# Altium PCB 12.4呼叫器.PcbDoc
Units mm, origin at the board's own origin, x right, y up, seen from the top; angles counter-clockwise.
Board outline 60 x 92 mm, 2 copper layers (Top Layer, Bottom Layer); 66 components, 43 nets, 268 pads, 58 vias.
Unrouted connection lines stored in the file: 5.
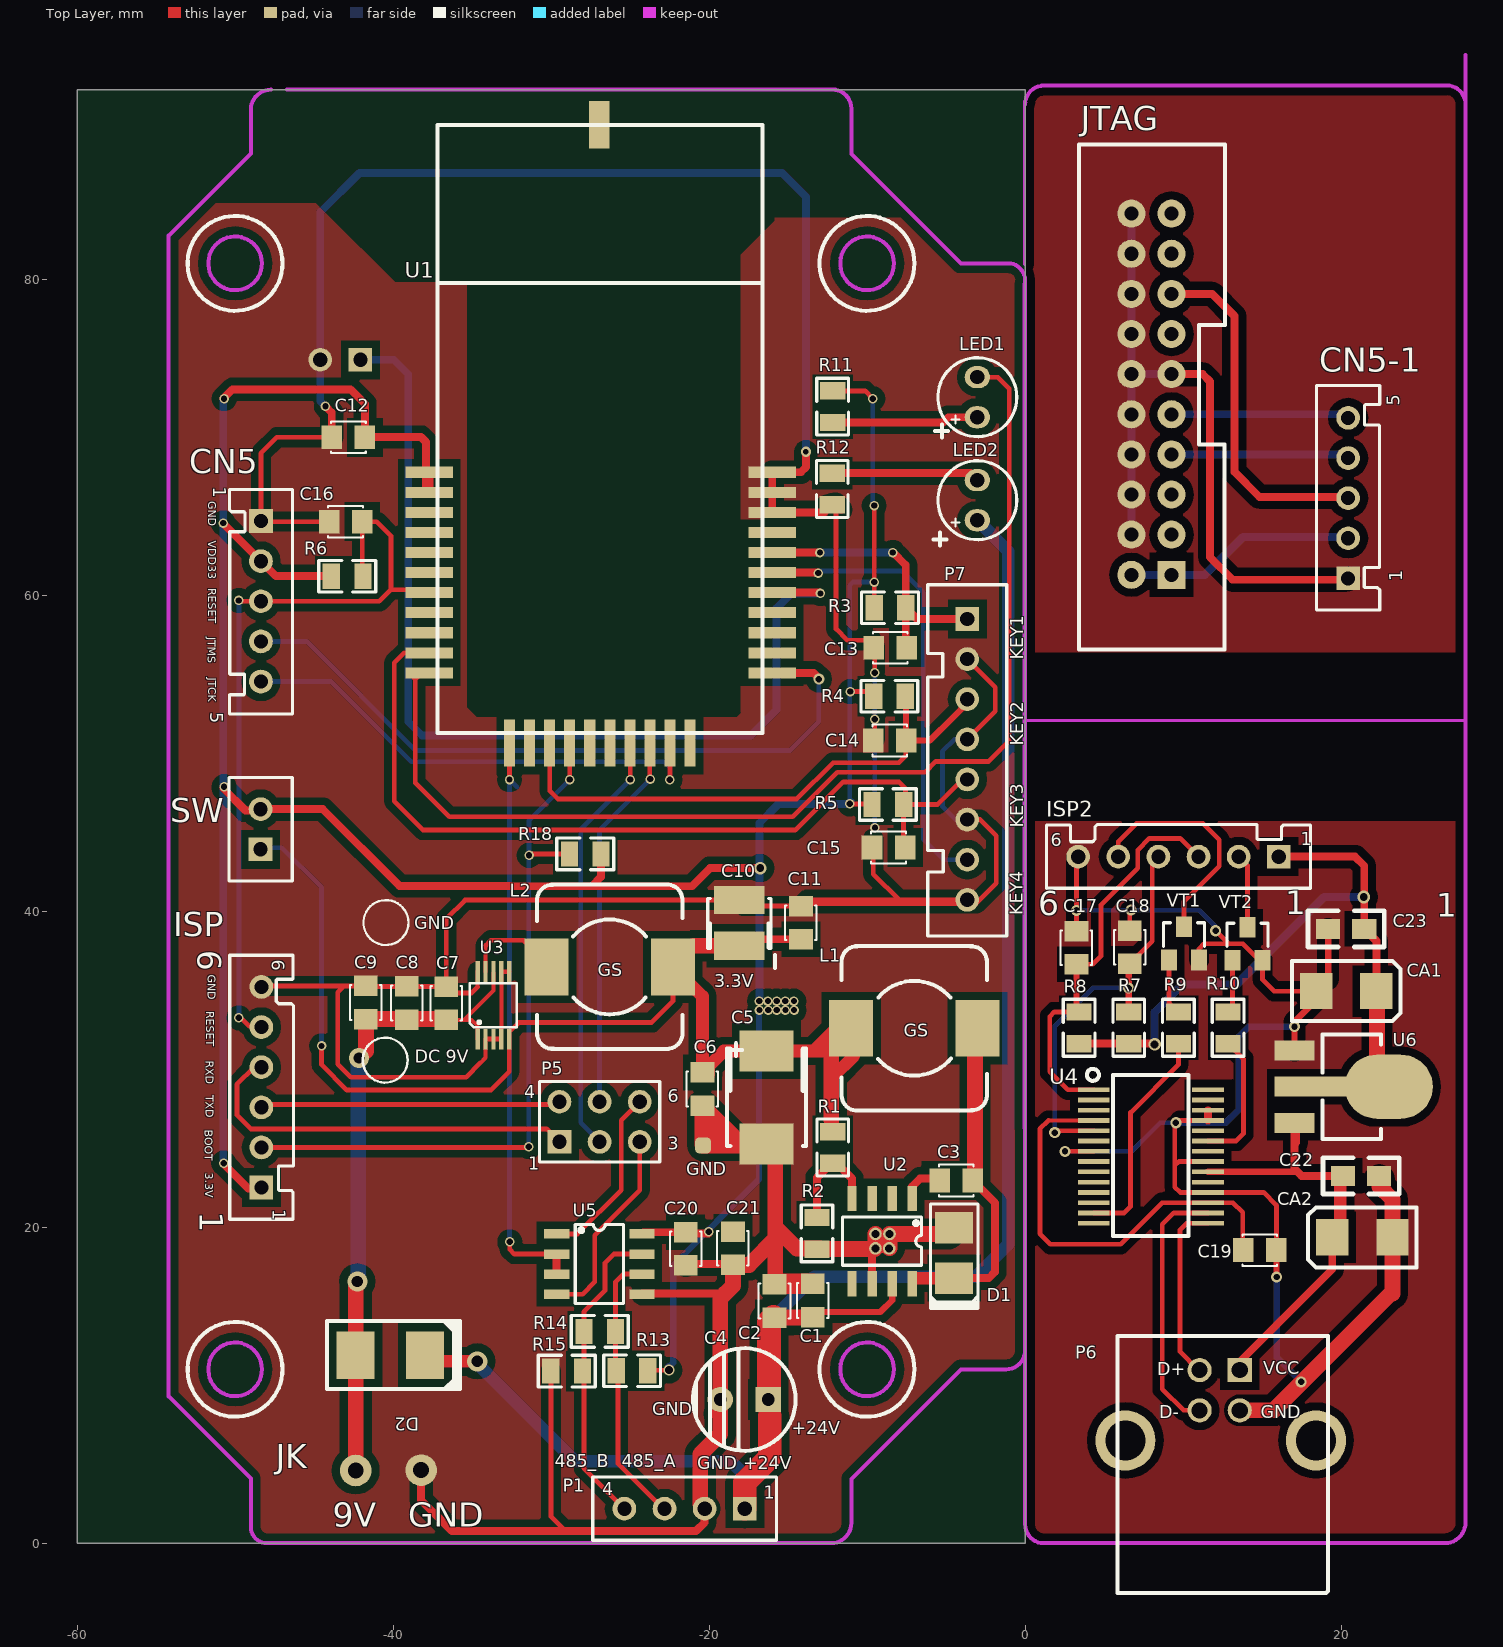
[diagram p0: Top Layer view]
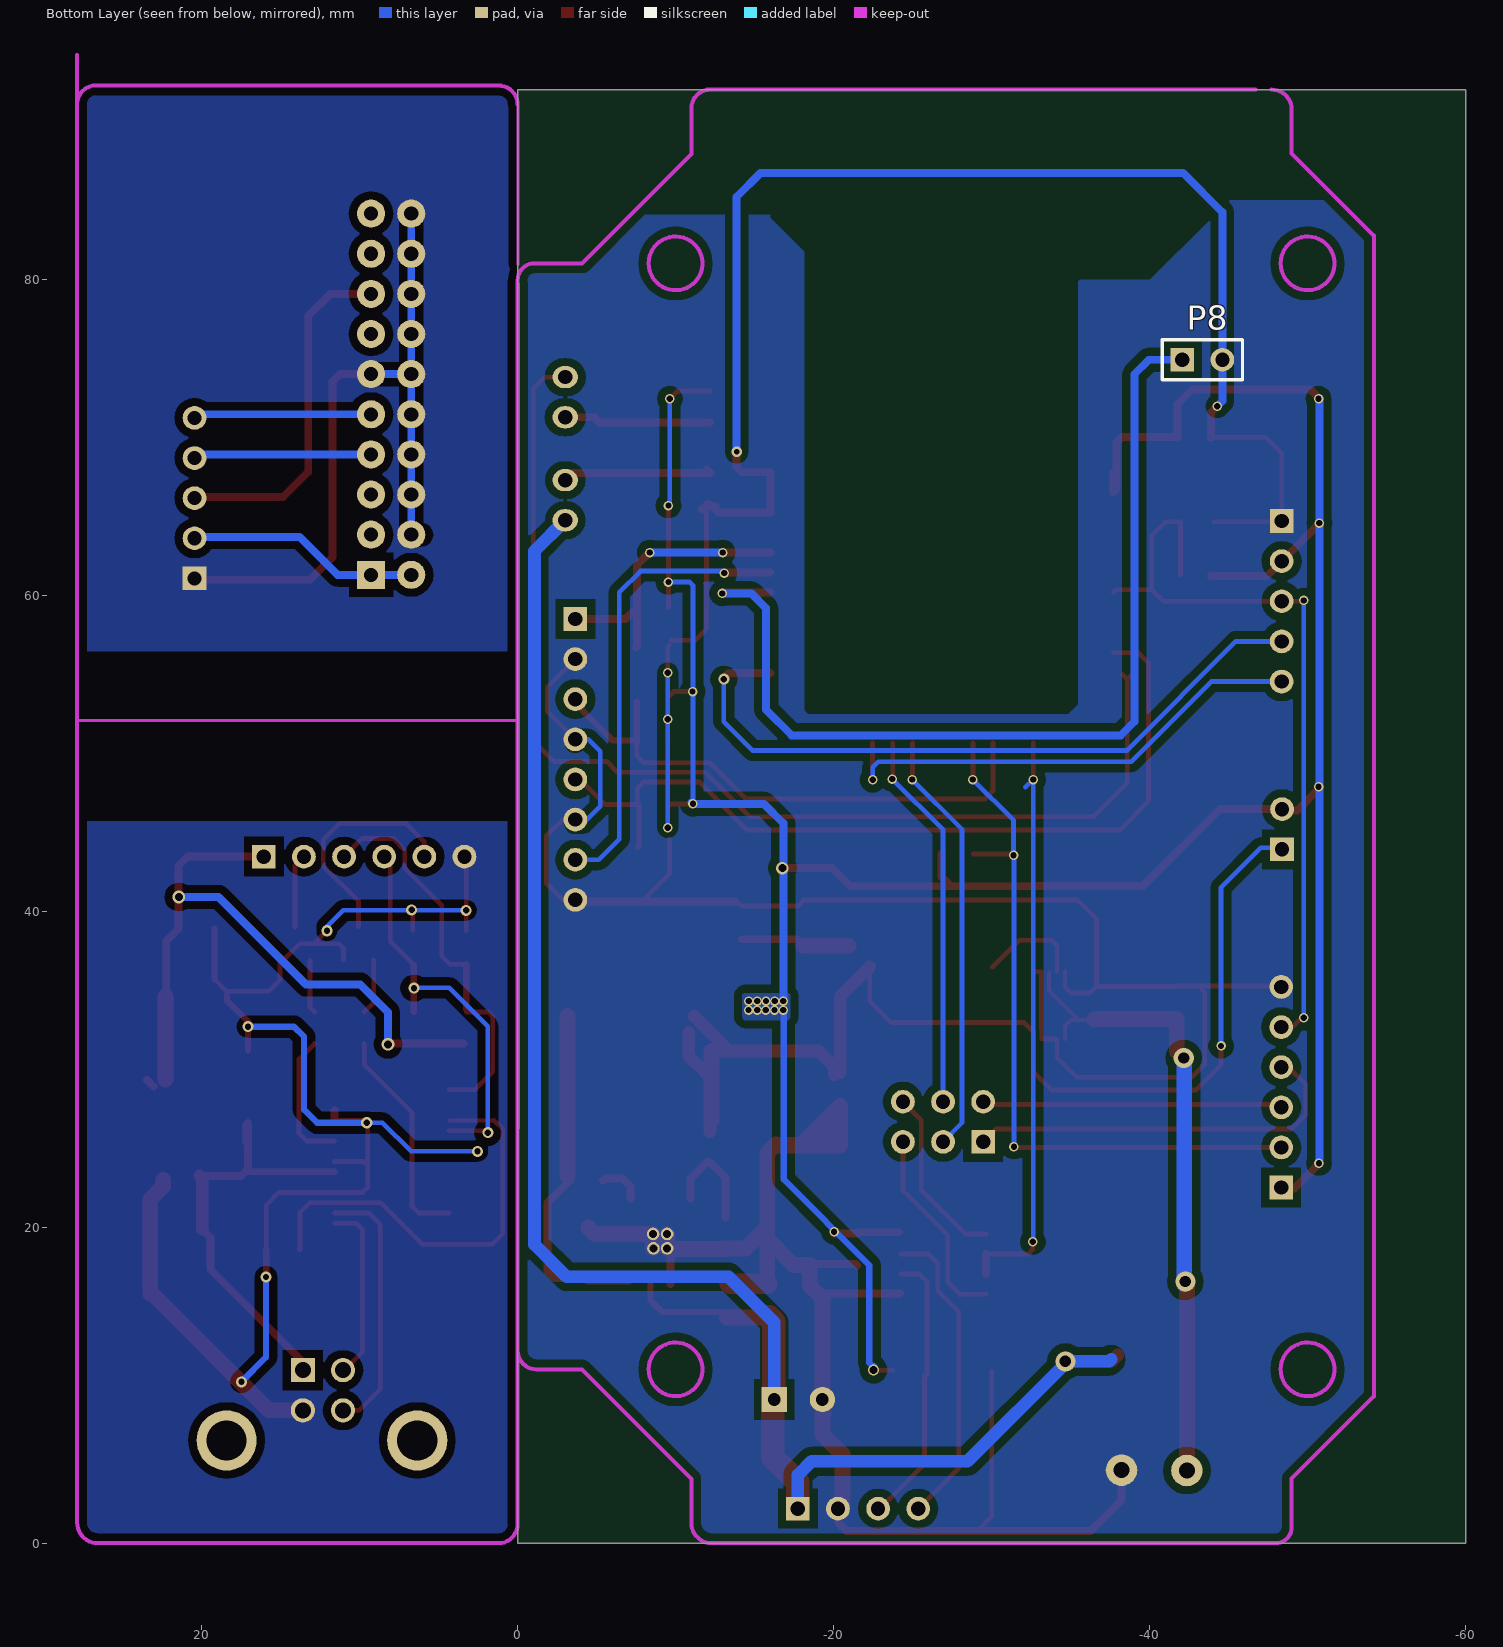
[diagram p1: Bottom Layer view, seen from below]

## Layer stack, top to bottom
Top Solder: solder mask 0.0102, Solder Resist, Dk 3.5
Top Layer: signal copper 0.0356
Dielectric1: dielectric 0.32, FR-4, Dk 4.8
Bottom Layer: signal copper 0.0356
Bottom Solder: solder mask 0.0102, Solder Resist, Dk 3.5

## Board outline
-60,0 0,0 0,92 -60,92

## Design rules (kind name [scope] priority, off if disabled: settings)
Clearance Clearance_1 [InComponent('U3')] p1: gap=0.2
Clearance leigerule [InPolygon] p2: gap=0.5
Clearance [All] p3: gap=0.24
FabricationTestPointUsage TestPointUsage [All] p1: valid=0 allowmultiple=FALSE
FabricationTestpoint Testpoint [All] p1: side=3 testpointundercomponent=TRUE minsize=1.016 maxsize=2.54 preferedsize=1.524 minholesize=0 maxholesize=1.016 preferedholesize=0.813 testpointgrid=0.025 allowsidetop=TRUE allowsidebottom=TRUE usegrid=TRUE gridtolerance=0
PolygonConnect [All] p1: connectstyle=Direct reliefconductorwidth=0.5 reliefentries=4 polygonreliefangle="90 Angle" airgapwidth=0.254
RoutingVias [All] p1: holewidth=0.711 width=1.27 viastyle="Through Hole" minholewidth=0.711 minwidth=1.27 maxholewidth=0.711 maxwidth=1.27
SolderMaskExpansion [All] p1: expansion=0.102
Width [All] p1: maxlimit=2 minlimit=0.254 preferedwidth=0.3 minimp=50.000000 maximp=50.000000 favimp=50.000000
27 further rules are at their usual default settings.

## Components (designator, comment, footprint, x,y, rotation, side; value= is the part's Value field where it differs from the comment)
C1 "4.7μF/10%/0805" C-0805 -14.33,17.06 r270 top
C2 "4.7μF/10%/0805" C-0805 -16.76,17.03 r270 top
C3 "0.01μF/10%/0805" C-0805 -6.06,22.05 r0 top
C4 "220μF" CZ3.0/6.5 -17.77,9.09 r0 top
C5 "476C" C-TAN-D -18.86,32.45 r270 top
C6 "0.1μf/10%/0805" C-0805 -19.52,27.04 r90 top
C7 "4.7μF/10%/0805" C-0805 -37.538,35.876 r270 top
C8 "4.7μF/10%/0805" C-0805 -40.03,35.89 r270 top
C9 "4.7μF/10%/0805" C-0805 -42.621,35.916 r270 top
C10 "47uF/20%/10V/B" C-TAN-B -16.078,36.906 r90 top
C11 "0.1μf/10%/0805" C-0805 -15.088,40.97 r270 top
C12 "0.1uf/10%/0805" C-0805 -44.53,69.09 r0 top
C13 "0.1uf/10%/0805" C-0805 -10.236,55.778 r0 top
C14 "0.1uf/10%/0805" C-0805 -10.26,49.9 r0 top
C15 "0.1uf/10%/0805" C-0805 -10.338,43.129 r0 top
C16 "0.1uf/10%/0805" C-0805 -44.704,63.754 r0 top
C17 "100pf/10%/0805" C-0805 2.35,39.39 r270 top
C18 "100pf/10%/0805" C-0805 5.73,39.42 r270 top
C19 "0.1μf/10%/0805" C-0805 16.56,19.45 r180 top
C20 "0.1uf/10%/0805" C-0805 -20.58,16.93 r90 top
C21 "1uf/10%/0805" C-0805 -17.59,16.96 r90 top
C22 "0.1uF" C0805 19.87,23.25 r180 top
C23 "0.1uF" C0805 21.72,38.88 r0 top
CA1 "4.7UF/16V" 3528 22.49,32.27 r0 top
CA2 "10UF/16V" 3528 19.19,22.03 r180 top
CN5 "1*5/排针" PIN-S-2.54-1*5 -48.362,64.694 r270 top
CN5-1 "1*5/排针座" PIN-S-2.54-1*5 20.447,61.062 r90 top
D1 "1N5408/SMA" "SMA 2+" -6.04,21.51 r270 top
D2 "SS34" SMB -43.688,9.804 r0 top
ISP "1*6/排针" PIN-S-2.54-1*6 -48.336,22.504 r90 top
ISP2 "1*6/排针座" PIN-S-2.54-1*6 16.06,43.45 r180 top
JTAG "2*10/排针" IDC-20 9.27,61.264 r90 top
L1 "15μH" GSDS104C2 -7.01,32.588 r270 top
L2 "15μH" GSDS104C2 -26.289,36.474 r90 top
LED1 "green LED" LED-φ3 -3.02,72.53 r90 top
LED2 "red LED" LED-φ3 -3.02,66.01 r90 top
P1 "1*4/2.54排针" PIN-S-2.54-1*4 -17.74,2.18 r180 top locked
P5 "2*3排针" HDR2X3_CEN -29.47,25.4 r0 top
P6 "1*4/2.54排针" USB_B_90D 13.614,10.973 r270 top
P7 "Header 8" HDR1X8 -3.658,58.496 r270 top (schematic designator P6)
P8 "Header 2" HDR1X2 -42.07,74.9 r180 bottom
R1 "10K" R-0805 -11.278,23.546 r90 top
R2 "5.9K/1%" R-0805 -14.07,21.11 r270 top
R3 "10K/5%/0805" R-0805 -7.05,60.11 r180 top
R4 "10K/5%/0805" R-0805 -7.087,54.508 r180 top
R5 "10K/5%/0805" R-0805 -7.188,47.65 r180 top
R6 "10K/5%/0805" R-0805 -41.402,62.103 r180 top
R7 "3.3K/5%/0805" R-0805 5.663,34.12 r270 top
R8 "3.3K/5%/0805" R-0805 2.52,34.12 r270 top
R9 "1K/5%/0805" R-0805 8.807,34.12 r270 top
R10 "1K/5%/0805" R-0805 11.95,34.12 r270 top
R11 "510Ω/5%/0805" R-0805 -13.08,73.43 r270 top
R12 "4K/5%/0805" R-0805 -11.31,65.22 r90 top
R13 "3.3K/5%/0805" R-0805 -26.37,10.01 r0 top
R14 "120ohm" R-0805 -28.42,12.5 r0 top
R15 "3.3K/5%/0805" R-0805 -30.51,9.99 r0 top
R18 "10K/5%/0805" R-0805 -29.337,42.723 r0 top
SW "SW-1" PIN-S-2.54-1*2 -48.387,43.917 r90 top
U1 "STM32W_1" STM32W108-3 -16.63,51.27 r90 top locked
U2 "TPS5430" SO-G8 -9.06,19.11 r180 top
U3 "TPS62056" MSOP-10 -34.648,32.006 r0 top
U4 "FT232R" SSOP-28 4.34,28.7 r0 top
U5 "MAX3485CSA" SO-G8 -26.949,17.653 r270 top
U6 "AS1117-3.3V" SOT-223 23,28.89 r270 top
VT1 "2N3904" SOT23-3 9.11,36.91 r0 top
VT2 "2N3904" SOT23-3 13.13,36.89 r0 top

## Footprints (in the part's own frame and the unit in brackets; to place one, negate y for a bottom-side part, rotate by r counter-clockwise, add the part's x,y. Pads: shape width x height; smd on the part's side, far side on the other; paste and mask are expansions set on the pad)
3528 [mil]
  rect 80.63x90 smd: 1(-10,105) 2(-160,105)
  silkscreen extent -220,30 50,180
C0805 [mil]
  rect 60x50 smd: 1(-100,0) 2(-10,0)
  silkscreen extent -150,-45 40,45
C-0805 [mm]
  rect 1.3x1.5 smd: 1(0.65,0.9) 2(2.75,0.9)
  silkscreen extent 0.6,-0.1 2.8,1.9
C-TAN-B [mm]
  rect 1.8x3.2 smd: 1(0.9,2) 2(3.8,2)
  silkscreen extent 0.75,0 3.9,4
C-TAN-D [mm]
  rect 2.6x3.4 smd: 1(1.3,2.5) 2(7.2,2.5)
  silkscreen extent 1.15,0 7.3,5
CZ3.0/6.5 [mm]
  rect 1.6x1.6 hole 0.8: 1(1.524,0)
  round 1.6 hole 0.8: 2(-1.524,0)
  silkscreen extent -3.25,-3.25 3.25,3.25
GSDS104C2 [mm]
  rect 3.6x2.8 smd: 1(0,4) 2(0,-4)
  silkscreen extent -5.2,-4.6 5.21,4.6
HDR1X2 [mm] "Connector; Header; 2 Positi"
  rect 1.5x1.5 hole 0.9: 1(0,0)
  round 1.5 hole 0.9: 2(2.54,0)
  silkscreen extent -1.27,-1.27 3.81,1.27
HDR1X8 [mm] "Connector; Header; 9 Position"
  rect 1.5x1.5 hole 0.9: 1(0,0)
  round 1.5 hole 0.9: 2(2.54,0) 3(5.08,0) 4(7.62,0) 5(10.16,0) 6(12.7,0) 7(15.24,0) 8(17.78,0)
  silkscreen extent -2.16,-2.5 20.07,2.5
HDR2X3_CEN [mm] "Connector; Header; 3x2 Position"
  rect 1.5x1.5 hole 0.9: 1(0,0)
  round 1.5 hole 0.9: 2(2.54,0) 3(5.08,0) 4(0,2.54) 5(2.54,2.54) 6(5.08,2.54)
  silkscreen extent -1.27,-1.27 6.35,3.81
IDC-20 [mil]
  rect 70x70 hole 35: 1(1,0)
  round 70 hole 35: 2(1,100) 3(101,0) 4(101,100) 5(201,0) 6(201,100) 7(301,0) 8(301,100) 9(401,0) 10(401,100) 11(501,0) 12(501,100) 13(601,0) 14(601,100) 15(701,0) 16(701,100) 17(801,0) 18(801,100) 19(901,0) 20(901,100)
  silkscreen extent -185,-133 1073,231
LED-φ3 [mm]
  oval 1.4x1.6 hole 0.9: 1(-1.27,0) 2(1.27,0)
  silkscreen extent -2.5,-2.5 2.5,2.5
MSOP-10 [mm]
  rect 0.27x1.3 smd mask+0.05: 1(0,-0.1) 2(0.5,-0.1) 3(1,-0.1) 4(1.5,-0.1) 5(2,-0.1) 6(2,4.175) 7(1.5,4.175) 8(1,4.175) 9(0.5,4.175) 10(0,4.175)
  silkscreen extent -0.51,0.64 2.46,3.43
PIN-S-2.54-1*2 [mm]
  rect 1.5x1.5 hole 0.9: 1(0,0)
  round 1.5 hole 0.9: 2(2.54,0)
  silkscreen extent -2,-2 4.54,2
PIN-S-2.54-1*4 [mm]
  rect 1.5x1.5 hole 0.9: 1(0,0)
  round 1.5 hole 0.9: 2(2.54,0) 3(5.08,0) 4(7.62,0)
  silkscreen extent -2,-2 9.62,2
PIN-S-2.54-1*5 [mm]
  rect 1.5x1.5 hole 0.9: 1(0,0)
  round 1.5 hole 0.9: 2(2.54,0) 3(5.08,0) 4(7.62,0) 5(10.16,0)
  silkscreen extent -2,-2 12.22,2
PIN-S-2.54-1*6 [mm]
  rect 1.5x1.5 hole 0.9: 1(0,0)
  round 1.5 hole 0.9: 2(2.54,0) 3(5.08,0) 4(7.62,0) 5(10.16,0) 6(12.7,0)
  silkscreen extent -2,-2.03 14.7,2
R-0805 [mm]
  rect 1.1x1.6 smd: 1(0.5,0.9) 2(2.5,0.9)
  silkscreen extent -0.3,-0.1 3.3,1.9
"SMA 2+" [mm]
  rect 2x2.4 smd: 1(1.538,1.554) 2(4.738,1.554)
  silkscreen extent 0.04,0.05 6.64,3.05
SMB [mm]
  rect 2.4x3 smd: 1(1.3,2.1) 2(5.7,2.1)
  silkscreen extent -0.51,-0.05 7.92,4.24
SO-G8 [mm]
  rect 0.6x1.6 smd: 1(-1.916,-2.7) 2(-0.646,-2.7) 3(0.624,-2.7) 4(1.894,-2.7) 5(1.894,2.7) 6(0.624,2.7) 7(-0.646,2.7) 8(-1.916,2.7)
  silkscreen extent -2.51,-1.52 2.49,1.52
SOT23-3 [mm]
  rect 1x1.3 smd: 1(0,0) 2(1.9,0) 3(0.95,2.1)
  silkscreen extent -0.35,0.87 2.25,2.35
SOT-223 [mil]
  rect 50x100 smd: 1(-90.5,-234) 3(90.5,-234)
  oval 160x220 smd: 2(0,1)
  rect 50x200 smd: 2(0,-184)
  silkscreen extent -130,-164 130,-19
SSOP-28 [mm]
  rect 2x0.3 smd: 1(0,0) 2(0,-0.65) 3(0,-1.3) 4(0,-1.95) 5(0,-2.6) 6(0,-3.25) 7(0,-3.9) 8(0,-4.55) 9(0,-5.2) 10(0,-5.85) 11(0,-6.5) 12(0,-7.15) 13(0,-7.8) 14(0,-8.45) 15(7.239,-8.45) 16(7.239,-7.8) 17(7.239,-7.15) 18(7.239,-6.5) 19(7.239,-5.85) 20(7.239,-5.2) 21(7.239,-4.55) 22(7.239,-3.9) 23(7.239,-3.25) 24(7.239,-2.6) 25(7.239,-1.95) 26(7.239,-1.3) 27(7.239,-0.65) 28(7.239,0)
  silkscreen extent -0.43,-9.27 5.99,1.32
STM32W108-3 [mm]
  rect 0.7x3 smd: 1(16.51,21.074) 2(15.24,21.074) 3(13.97,21.074) 4(12.7,21.074) 5(11.43,21.074) 6(10.16,21.074) 7(8.89,21.074) 8(7.62,21.074) 9(6.35,21.074) 10(5.08,21.074) 11(3.81,21.074) 22(3.81,-0.627) 23(5.08,-0.627) 24(6.35,-0.627) 25(7.62,-0.627) 26(8.89,-0.627) 27(10.16,-0.627) 28(11.43,-0.627) 29(12.7,-0.627) 30(13.97,-0.627) 31(15.24,-0.627) 32(16.51,-0.627)
  rect 3x0.7 smd: 12(-0.627,16.002) 13(-0.627,14.732) 14(-0.627,13.462) 15(-0.627,12.192) 16(-0.627,10.922) 17(-0.627,9.652) 18(-0.627,8.382) 19(-0.627,7.112) 20(-0.627,5.842) 21(-0.627,4.572)
  rect 3x1.3 smd: ""(38.5,10.314)
  silkscreen extent 0,0 38.5,20.57
USB_B_90D [mil]
  rect 60.06x60.06 hole 40: 1(1,-1)
  round 60.06 hole 40: 2(1,-101) 3(101,-101) 4(101,-1)
  round 150 hole 100: 5(176,-286) 6(176,189)
  silkscreen extent -84,-306 556,219

## Part data
C1 C2 C3 C6 C7 C8 C9 C11 C12 C13 C14 C15 C16 C17 C18 C19 C20 C21 C22 C23: library part Cap, "Capacitor"
C4 C5: library part "Cap Pol1", "Polarized Capacitor (Radial)"
C10: library part ASC-0013BA
CA1 CA2: library part ECAP
CN5 CN5-1: library part Header1*5
D1 D2: library part "Diode 1N5408", "3 Amp Medium Power Silicon Rectifier Diode"
ISP ISP2: library part Header1*6
JTAG: library part Header2*10
L1 L2: library part Inductor, "Inductor"
LED1: library part LED
LED2: library part LED3, "Typical BLUE SiC LED"
P1 P6: library part "Header 4", "Header, 4-Pin"
P5: library part "Header 3X2A", "Header, 3-Pin, Dual row"
P7: "Header, 8-Pin"
P8: "Header, 2-Pin"
R1 R2 R3 R4 R5 R6 R12 R18: library part Res2, "Resistor"
R7 R8: library part RES_1
R9 R10 R11 R13 R14 R15: library part RES, "R"
U1: library part STM32W108-3
U5: library part MAX485CSA, "Low-Power, Slew-Rate-Limited RS-485/RS-422 Transceiver"
U6: library part AS1117
VT1 VT2: library part NPN, "NPN Transistor"

## Free pads (board coordinates)
  round 2 hole 1: 0(-38.227,4.623) 1(-42.367,4.597)
  round 0.8 hole 0.5: 0(-9.47,19.57) 1(-8.58,19.57) 2(-9.47,18.66) 3(-8.6,18.66)
  rrect50% 1x1 smd: 5(-20.38,25.17)

## Via types
v1: diameter 0.6, hole 0.4, Top Layer to Bottom Layer, 39 vias
v2: diameter 0.7, hole 0.4, Top Layer to Bottom Layer, 11 vias
v3: diameter 0.8, hole 0.5, Top Layer to Bottom Layer, 3 vias
v4: diameter 1.27, hole 0.711, Top Layer to Bottom Layer, 3 vias
v5: diameter 0.7, hole 0.5, Top Layer to Bottom Layer, 1 vias
v6: diameter 0.65, hole 0.35, Top Layer to Bottom Layer, 1 vias

## Nets (pads, with @x,y where several pads share a name; then routed paths per layer and width w, separated by ;. In a path a pad name is that pad's centre, name@x,y a point inside that pad or via, vN(x,y) a via of type N, cw(c..) or ccw(c..) an arc to the next point about the centre after c; other vN are vias at no path point)
485_A: P1.3 R13.1 R14.2 U5.6 | length 17.5
  Top Layer w0.3: R13.1@-25.92,10.64 R14.2 -25.92,16.549 -25.44,17.029 U5.6 ; R13.1@-25.76,10.64 -25.76,5.03 -22.91,2.18 P1.3
485_B: P1.4 R14.1 R15.2 U5.7 | length 19.7
  Top Layer w0.3: P1.4 -27.92,4.74 R14.1 -27.92,14.65 -26.594,15.977 -26.594,17.729 -26.024,18.299 U5.7
+VBRD: CN5-1.2 JTAG.1 JTAG.2 | length 14.7
  Bottom Layer w0.5: JTAG.2 JTAG.1 11.395,61.289 13.79,63.684 20.365,63.684 CN5-1.2
/RESET: C16.2 CN5-1.3 CN5.3 ISP2.5 ISP.5 JTAG.15 R6.1 U1.7 VT1.3 | length 86.5
  Top Layer w0.3: v1(-49.759,33.249) -49.636,33.249 -49.098,32.711 -48.383,32.711 ISP.5 ; v1(-49.759,59.665) -49.708,59.614 CN5.3 -40.869,59.614 -40.132,60.35 ; R6.1@-41.954,61.255 C16.2 -41.032,64.654 -40.132,63.754 -40.132,60.35 ; U1.7 -37.894,60.35 -40.132,60.35 ; ISP2.5 5.9,44.406 7.036,45.542 11.278,45.542 12.294,44.526 12.294,42.85 10.06,40.616 VT1.3
  Top Layer w0.5: JTAG.15 11.844,79.069 13.25,77.664 13.25,67.804 14.83,66.224 20.365,66.224 CN5-1.3
  Bottom Layer w0.3: v1(-49.759,33.249) v1(-49.759,59.665)
BOOT: ISP2.2 ISP.2 R18.1 U1.15 VT2.3 | length 50.8
  Top Layer w0.3: ISP.2 v1@-31.42,25.044 ; v1(-31.394,43.536) -31.307,43.623 R18.1 ; v1(-28.82,48.33) U1.15@-28.82,50.641 ; ISP2.2 14.08,42.89 VT2.3
  Bottom Layer w0.3: v1(-31.42,25.095) -31.42,43.51 v1(-31.394,43.536) -31.394,45.756 v1(-28.82,48.33)
CBUS0: R10.2 U4.23 | length 8.5
  Top Layer w0.3: U4.23 13.35,25.45 13.83,25.93 13.83,30.64 R10.2
CBUS2: R9.2 U4.13 | length 14.1
  Top Layer w0.3: U4.13 6.27,20.9 6.68,21.311 6.68,27.254 9.707,30.281 R9.2
D+: P6.2 U4.15 | length 11.4
  Top Layer w0.3: P6.2 10.973,10.947 9.81,12.11 9.81,19.84 10.22,20.25 U4.15
D-: P6.3 U4.16 | length 16.5
  Top Layer w0.3: P6.3 10.033,8.407 8.69,9.75 8.69,20.17 9.42,20.9 U4.16
GND: C1.1 C2.1 C4.2 C5.2 C6.1 C7.1 C8.1 C9.1 C10.2 C11.1 C12.1 C13.1 C14.1 C15.1 C16.1 C17.1 C18.1 C19.1 C20.1 C21.1 C22.1 C23.1 CA1.2 CA2.2 CN5.1 D1.1 ISP2.6 ISP.6 P1.2 P6.4 P7.2 P7.4 P7.6 P7.8 P8.2 pad.0 pad.1@-8.58,19.57 pad.2 pad.3 pad.5 R2.2 R12.1 R15.1 U1.30 U1.31 U1.32 U2.6 U3.2 U3.3 U3.4 U3.6 U3.7 U3.10 U4.7 U4.18 U4.21 U4.25 U4.26 U5.5 U6.1 VT1.2 VT2.2 | length 430.1
  Top Layer w0.26: -34.648,35.202 U3.10 ; -34.468,30.404 -34.148,30.724 U3.2 ; U3.4@-33.168,31.906 -33.168,32.577 -33.148,32.597 U3.7
  Top Layer w0.3: ISP.6 -48.275,35.266 -43.093,35.266 ; C16.1 -48.322,64.654 CN5.1 -48.362,68.986 -47.358,69.99 C12.1 ; C9.1 -43.093,35.266 ; C9.1@-41.682,35.226 C7.1 ; -34.648,35.202 -35.027,34.823 -36.235,34.823 C7.1 ; -34.468,30.404 -35.382,29.489 -42.672,29.489 -43.497,30.315 -43.497,34.861 -43.093,35.266 ; U3.2@-34.061,31.902 U3.3 -33.299,31.906 ; U3.7@-33.045,36.17 U3.6 ; R15.1 -30.01,1.689 -29.083,0.762 ; R12.1 -11.96,65.47 -11.96,57.86 -11.24,57.14 C13.1@-9.7,57.14 ; C15.1@-9.61,44.59 -9.61,42.35 -7.976,40.716 ; C13.1@-9.606,56.841 -9.51,56.745 v1(-9.51,55.093) ; C14.1@-9.51,50.9 v1(-9.51,52.146) ; P7.8 -7.976,40.716 ; P7.6 -2.846,45.796 -1.82,44.77 -1.82,41.76 -3.09,40.49 -3.64,40.49 -3.65,40.48 C11.1@-14.028,40.48 ; P7.4 -1.88,52.654 -1.88,54.178 P7.2 ; v2(2.53,24.8) U4.7 ; C17.1 v2(3.25,40.056) ISP2.6@3.25,43.34 ; C18.1 6.63,40.006 v2(6.706,40.081) ; v2@9.48,26.42 9.48,23.91 ; v2@9.81,26.75 U4.25 ; VT1.2 11.01,37.617 11.323,37.93 12.903,37.93 ; U4.21 9.72,24.15 9.48,23.91 ; v2(12.065,38.76) 12.073,38.76 12.903,37.93 ; v2@15.91,16.856 v2(15.926,16.84) ; C19.1 15.91,21.4 15.11,22.2 9.82,22.2 9.48,22.54 9.48,23.91 ; CA1.2@18.39,34.646 18.39,34.901 CA1.2 ; CA1.2@19.18,35.691 CA1.2 ; C7.1 -36.638,39.511 -35.443,40.706 C10.2 -18.078,40.647 -17.752,40.32 C11.1 C11.1@-14.028,40.48 ; C11.1@-14.028,40.48 -13.792,40.716 -7.976,40.716 ; 12.903,37.93 13.792,37.93 14.832,36.89 VT2.2 15.03,35.668 15.761,34.937 CA1.2
  Top Layer w0.4: v2@15.91,16.856 C19.1 ; U6.1 v2(17.056,32.69) 17.056,33.008 18.39,34.341 CA1.2@18.39,34.646 ; CA1.2@19.18,35.691 C23.1
  Top Layer w0.5: v1(-44.28,71.95) -43.88,71.55 C12.1 ; pad.0@-38.227,4.623 -38.227,2.718 -36.271,0.762 -29.083,0.762 -20.828,0.762 -20.28,1.31 P1.2 ; U5.5@-24.21,15.796 -18.984,15.796 ; C20.1 -21.4,17.66 C21.1@-18.49,17.66 ; v6(-13.87,69.07) -13.87,68.1 -14.19,67.78 U1.32 U1.30 -12.69,65.24 R12.1 ; R12.1@-12.53,65.63 R12.1@-12.52,65.62 ; R12.1@-12.01,65.76 R12.1@-11.96,65.71 ; R12.1@-11.829,65.579 R12.1@-11.66,65.41 ; U2.6 -9.684,18.446 -9.52,18.61 -8.65,18.61 pad.3 pad.3@-8.58,18.68 ; U4.25 U4.26
  Top Layer w1: P1.2 -20.56,2.46 -20.56,5.63 -19.294,6.896 -19.294,8.18 ; -19.366,8.18 -19.294,8.18 ; C2.1@-15.93,16.29 -15.81,16.41 -15.81,20.01 ; -15.63,19.45 -17.47,17.61 C21.1 -18.49,16.29 -18.984,15.796 -19.294,15.486 C4.2 -19.294,8.18 ; R2.2 R2.2@-12.93,18.61 ; pad.2@-9.52,18.61 R2.2@-12.93,18.61 ; pad.2 pad.0@-9.47,19.57 ; pad.3@-8.58,18.68 -8.58,19.57 -4.888,19.57 D1.1 ; P6.4 15.748,8.407 23.139,15.799 ; C22.1@22.42,22.99 22.42,22.58 23.254,21.746 CA2.2 23.254,15.799 ; -20.42,26.5 C6.1 C5.2@-17.94,25.21 ; -20.42,26.5 -20.42,25.21 pad.5 -16.44,25.17 C5.2@-16.4,25.21 ; -20.42,26.5 -19.13,25.21 C5.2@-17.94,25.21 ; C5.2@-17.94,25.21 C5.2@-16.4,25.21 ; C5.2@-16.4,25.21 C5.2 -15.81,24.7 -15.81,20.01 ; -15.81,20.01 -14.45,18.65 -12.97,18.65 R2.2@-12.93,18.61
  Top Layer w1.3: C2.1@-15.81,16.41 C1.1
  Bottom Layer w0.3: v1@-9.51,45.288 v1(-9.51,52.146) v1(-9.51,55.093) ; P7.4@-3.658,50.65 P7.4@-3.64,50.65 ; P7.4 -4.464,50.876 -5.23,50.11 -5.23,46.63 -4.17,45.57 -3.64,45.57 P7.6@-3.61,45.54 ; v2(2.53,24.8) 6.741,24.8 8.549,26.608 v2(9.544,26.608) ; v2(3.25,40.056) 11.024,40.056 12.065,39.014 v2(12.065,38.76)
  Bottom Layer w0.4: v2(9.544,26.608) 12.689,26.608 13.513,27.432 13.513,32.055 14.148,32.69 v2(17.056,32.69) ; v2(15.926,16.84) 15.926,11.76 v2(17.475,10.211)
  Bottom Layer w0.5: v1(-44.28,71.95) -44.61,72.28 P8.2 -44.61,84.24 -42.13,86.72 -15.37,86.72 -13.87,85.22 v6(-13.87,69.07)
  other v1: -9.5,45.288
GND1: CN5-1.1 JTAG.4 JTAG.6 JTAG.8 JTAG.10 JTAG.11 JTAG.12 JTAG.14 JTAG.16 JTAG.18 JTAG.20 | length 46.6
  Top Layer w0.5: JTAG.11 11.244,73.989 11.71,73.524 11.71,62.404 13.14,60.974 20.359,60.974 CN5-1.1
  Bottom Layer w0.5: JTAG.4@6.105,63.829 JTAG.4 JTAG.6 JTAG.8 JTAG.10 JTAG.12 ; JTAG.20 JTAG.18 JTAG.16 JTAG.14 JTAG.12 ; JTAG.11 JTAG.12
JNTRST: JTAG.3
JTCK: CN5-1.5 CN5.5 JTAG.9 U1.20 | length 42.5
  Top Layer w0.3: v1(-22.479,48.311) -22.472,48.318 U1.20
  Bottom Layer w0.3: CN5.5 -43.917,54.534 -38.837,49.454 -22.835,49.454 -22.479,49.098 v1(-22.479,48.311)
  Bottom Layer w0.5: JTAG.9 20.219,71.449 CN5-1.5
JTDI: JTAG.5
JTDO: JTAG.13
JTMS: CN5-1.4 CN5.4 JTAG.7 U1.22 | length 56
  Top Layer w0.5: U1.22 -13.373,55.08 -13.056,54.763 v2(-13.056,54.682)
  Bottom Layer w0.3: CN5.4 -45.466,57.074 -38.557,50.165 -14.884,50.165 -13.056,51.994 v2@-13.056,54.635
  Bottom Layer w0.5: JTAG.7 20.219,68.909 CN5-1.4
KEY1: C13.2 P7.1 R3.1 U1.28 | length 18.2
  Top Layer w0.5: U1.28 v1(-12.98,62.7) ; v1(-8.37,62.7) -8.35,62.7 -7.55,61.9 R3.1 ; C13.2 -7.55,56.742 R3.1 ; P7.1@-3.658,58.27 P7.1@-3.64,58.27 ; P7.1 -6.836,58.496 R3.1
  Bottom Layer w0.5: v1(-12.98,62.7) v1(-8.37,62.7)
KEY2: C14.2 P7.3 R4.1 U1.14 | length 35.2
  Top Layer w0.3: U1.14 -30.092,47.612 -29.58,47.1 -14.45,47.1 -12.15,49.4 -7.98,49.4 -7.55,49.83 C14.2@-7.55,50.6
  Top Layer w0.4: C14.2@-7.55,50.6 -7.536,50.614 R4.1@-7.536,53.253 ; C14.2 -6.03,50.8 -4.579,52.251 P7.3@-3.64,53.19
KEY3: C15.2 P7.5 R5.1 U1.10 | length 53.7
  Top Layer w0.3: U1.10 -39.3,56.35 -39.93,55.72 -39.93,46.966 -38.1,45.136 -14.544,45.136 -11.5,48.18 -7.98,48.18 -7.57,47.77 -7.57,46.869 R5.1 ; C15.2 -7.688,44.13 R5.1 ; P7.5@-4.189,48.11 -5.548,46.75 R5.1
KEY4: P7.7 U1.27 | length 29.1
  Top Layer w0.3: v1@-13.11,61.43 v1(-13.08,61.4)
  Top Layer w0.5: U1.27 v1@-13.11,61.43
  Bottom Layer w0.3: v1(-13.08,61.4) -12.957,61.523 -7.783,61.523 -6.44,60.18 -6.44,44.56 -5.136,43.256 P7.7
NetC3_1: C3.1 U2.1 | length 2.8
  Top Layer w0.5: U2.1 -7.144,22.576 -6.65,23.07 -5.53,23.07 C3.1
NetC3_2: C3.2 D1.2 L1.1 U2.8 | length 21.8
  Top Layer w0.5: D1.2 -2.298,16.772 -1.9,17.17 -1.9,21.54 C3.2 C3.2@-3.39,23.03
  Top Layer w0.8: U2.8@-6.99,16.772 D1.2
  Top Layer w1: C3.2@-3.17,23.25 L1.1@-3.17,33.36
NetC5_1: C5.1 C6.2 C10.1 C11.2 L1.2 L2.2 R1.2 SW.1 U3.5 | length 83
  Top Layer w0.3: v1(-44.526,31.471) -44.526,30.277 -42.926,28.677 -33.803,28.677 -32.648,29.832 U3.5 -32.648,32.362 -32.06,32.95 -23.647,32.95 -22.289,34.308 L2.2
  Top Layer w0.5: C10.1 -17.664,38.22 C11.2
  Top Layer w0.8: L2.2 -20.42,34.605 C6.2 C6.2@-20.04,30.17 ; C6.2@-20.04,29.65 C6.2@-20.04,30.17 ; L1.2@-12.27,31.15 -13.38,31.15 ; R1.2 -12.178,29.504 -10.838,30.844 L1.2@-10.838,32.326 ; L1.2@-11.499,33.031 -13.38,31.15 ; L1.2@-11.476,33.054 L1.2@-11.17,33.36 ; C6.2@-20.04,30.17 -19.06,31.15 C5.1 -13.38,31.15
  Top Layer w1: L2.2@-20.957,37.806 C10.1 ; -12.27,26.76 L1.2@-12.27,31.15
  Bottom Layer w0.3: SW.1 -48.285,44.018 -47.041,44.018 -44.526,41.504 v1(-44.526,31.471)
NetC19_2: C19.2 U4.4 U4.17 | length 27
  Top Layer w0.26: 1.499,26.746 U4.4@4.287,26.746
  Top Layer w0.3: 1.499,26.746 1.473,26.746 0.94,26.213 0.94,19.583 1.6,18.923 6.045,18.923 8.672,21.55 U4.17 13.16,21.55 13.77,20.94 13.77,18.59 C19.2
NetL2_1: L2.1 U3.9 | length 6.6
  Top Layer w0.26: U3.9 -34.148,37.822
  Top Layer w0.3: -34.148,37.822 -33.81,38.16 -31.76,38.16 L2.1@-30.05,36.45
NetLED1_1: LED1.1 R11.2 | length 9.3
  Top Layer w0.5: R11.2 -5.19,70.93 -4.86,71.26 LED1.1
NetLED2_2: LED2.2 R12.2 | length 9.7
  Top Layer w0.5: R12.2@-11.98,67.95 R12.2 -3.46,67.72 LED2.2
NetR1_1: R1.1 R2.1 U2.4 | length 6.6
  Top Layer w0.5: R2.1 -13.17,23.136 R1.1@-12.27,24.036 ; R1.1@-12.052,24.172 -10.954,23.074 U2.4
NetR9_1: R9.1 VT1.1 | length 3.5
  Top Layer w0.3: VT1.1 9.11,34.217 R9.1
NetR10_1: R10.1 VT2.1 | length 3.4
  Top Layer w0.3: R10.1 13.13,33.9 VT2.1
PA1: LED1.2 U1.11 | length 72.5
  Top Layer w0.3: U1.11@-38.9,54.98 -38.59,54.67 ; U1.11@-38.28,54.98 -38.59,54.67 ; LED1.2 -1.72,73.8 -1,73.08 -1,50.78 -2.304,49.476 -5.638,49.476 -6.325,48.79 -11.89,48.79 -14.706,45.974 -36.449,45.974 -38.59,48.115 -38.59,54.67
SHINENG: U1.12 U5.2 U5.3 | length 37.1
  Top Layer w0.3: v1(-32.632,48.33) U1.12 ; v1(-32.614,19.071) -32.614,18.593 -32.32,18.299 U5.2
  Top Layer w0.5: U5.3 U5.2
  Bottom Layer w0.3: v1@-32.632,19.068 v1(-32.632,48.33) -32.63,48.33 -32.142,47.842
SRST: P8.1 U1.26 | length 62.4
  Top Layer w0.5: U1.26 -13,60.16 v1(-12.95,60.11)
  Bottom Layer w0.5: P8.1 -39.96,74.9 -39.04,73.98 -39.04,51.99 -38.18,51.13 -17.35,51.13 -15.73,52.75 -15.73,59.18 -14.8,60.11 v1(-12.95,60.11)
UART_RXD: P5.5 U1.19 | length 24.3
  Top Layer w0.3: v1@-23.856,48.436 -23.78,48.36 v1(-23.72,48.36) -23.75,48.33 -23.75,50.635 U1.19
  Bottom Layer w0.3: P5.5 -26.93,45.15 v1(-23.72,48.36)
"UART_RXD 485": P5.6 U5.1 | length 11.3
  Top Layer w0.3: U5.1 -28.335,19.569 -25.558,22.346 -25.558,26.772 P5.6
UART_RXD_USB: C18.2 ISP2.4 ISP.4 P5.1 R7.1 U4.5 | length 50.6
  Top Layer w0.3: ISP.4@-48.311,30.124 ISP.4 -48.793,30.124 -49.886,29.032 -49.886,27.102 -48.997,26.213 -30.283,26.213 P5.1 ; v2(1.88,25.984) 1.995,26.1 U4.5 ; C18.2@6.563,36.603 C18.2 8.052,38.092 8.052,43.062 ISP2.4
  Top Layer w0.4: R7.1 C18.2@6.563,36.603
  Bottom Layer w0.3: v2(1.88,25.984) 1.88,32.715 4.318,35.154 6.528,35.154 v2(6.553,35.128)
UART_TXD: P5.2 U1.18 | length 27
  Top Layer w0.3: U1.18 -24.99,50.621 v1(-24.99,48.33)
  Bottom Layer w0.3: P5.2 -28.13,26.6 -28.13,45.19 v1(-24.99,48.33)
"UART_TXD 485": P5.3 U5.4 | length 12.8
  Top Layer w0.3: U5.4 -28.005,15.759 -27.229,16.535 -27.229,19.494 -24.39,22.333 P5.3
UART_TXD_USB: C17.2 ISP2.3 ISP.3 P5.4 R8.1 U4.1 | length 44.5
  Top Layer w0.3: ISP.3 -48.158,27.762 -29.648,27.762 P5.4 ; R8.1@3.25,33.62 1.86,33.62 1.57,33.33 1.57,29.83 2.7,28.7 U4.1 ; C17.2 4.28,36.64 4.801,37.16 4.801,40.386 7.137,42.723 7.137,43.866 7.874,44.602 9.828,44.602 ISP2.3
  Top Layer w0.4: R8.1@3.25,33.79 C17.2
VCC: C22.2 CA2.1 P6.1 U4.20 U6.3 | length 28.1
  Top Layer w0.4: U4.20 17.24,23.5
  Top Layer w0.5: P6.1 13.589,11.481 19.444,17.336 CA2.1 CA2.1@19.96,19.879 ; 17.156,25.35 17.156,26.491 U6.3 17.056,23.684 17.24,23.5 17.49,23.25 C22.2
  Top Layer w0.8: CA2.1@19.96,19.879 19.96,23.086 C22.2
VCC_9V: C7.2 C8.2 C9.2 D2.1 pad.1@-42.367,4.597 U3.1 U3.8 | length 41.1
  Top Layer w0.254: C7.2@-36.5,33.126 -35.504,33.126 ; U3.1 -34.648,32.748 -35.026,33.126 -35.504,33.126 ; U3.8@-33.648,36.081 -33.648,34.982 -35.504,33.126
  Top Layer w1: v4(-42.266,16.561) -42.367,16.459 -42.367,4.597 pad.1@-42.113,4.851 ; v4(-42.164,30.709) -41.721,31.151 C9.2 -36.539,33.166 C7.2@-36.5,33.126
  Bottom Layer w1: v4@-42.2,16.383 v4@-42.2,30.709
VCC_24V: C1.2 C2.2 C4.1 D2.2 LED2.1 P1.1 U2.7 | length 118.1
  Top Layer w0.4: C1.2@-13.355,14.385 -13.11,14.63 -9.164,14.63 -8.414,15.38 U2.7
  Top Layer w0.8: D2.2 -37.59,11.506 v4(-34.671,11.506)
  Top Layer w1: C2.2@-15.92,14.31 C2.2@-15.86,14.31 ; C2.2 C1.2@-13.25,14.28
  Top Layer w1.5: P1.1 -17.74,3.85 -16.16,5.43 -16.16,8.05 ; C4.1@-16.211,9.446 -16.211,14.019 C2.2@-15.92,14.31
  Bottom Layer w0.8: -37.567,11.633 -37.44,11.506 v4@-34.798,11.506 ; v4@-34.925,11.633 v4@-34.798,11.506 ; v4(-34.671,11.506) v4@-34.798,11.506 ; P1.1 -17.74,4.31 -18.612,5.182 -28.473,5.182 v4@-34.798,11.506 ; C4.1 -16.246,13.963 -13.349,16.86 -3.11,16.86 -1.07,18.9 -1.07,62.79 LED2.1
VDD33: C12.2 C20.2 C21.2 C23.2 CA1.1 CN5.2 ISP2.1 ISP.1 R3.2 R4.2 R5.2 R6.2 R7.2 R8.2 R11.1 R13.2 R18.2 SW.2 U1.1 U1.2 U5.8 U6.2 | length 243.9
  Top Layer w0.3: R13.2@-23.76,10.95 v5(-22.53,10.95) ; v1@-15.75,34.335 v1(-15.725,34.31) ; R11.1 -10.13,72.93 v1(-9.64,72.44) ; v1(-11.1,46.79) -9.728,46.79 R5.2 ; v1(-11.074,53.899) -9.877,53.899 R4.2 ; R3.2 v1(-9.55,65.67)
  Top Layer w0.5: v1@-50.749,24.028 -49.149,22.428 ; v1@-50.749,47.777 -49.342,46.37 SW.2@-48.387,46.37 ; v1@-50.749,64.541 CN5.2 -47.411,61.203 R6.2 ; v1@-50.749,72.441 -50.165,73.025 -42.697,73.025 -41.78,72.108 C12.2 -41.76,70.01 -38.24,70.01 -37.92,69.69 -37.92,66.726 U1.2 U1.1 ; SW.2 -44.45,46.457 -39.583,41.59 -32.529,41.59 -32.519,41.58 -27.432,41.58 ; R18.2 -26.837,42.175 -27.432,41.58 ; U5.8@-24.139,19.68 C20.2 ; C20.2@-21.48,19.606 v1@-20.03,19.606 ; v3(-16.764,42.723) -19.939,42.723 -21.082,41.58 -27.432,41.58 ; R8.2 R7.2 8.156,31.62 v3(8.204,31.572) ; ISP2.1 20.888,43.45 21.466,42.872 C23.2 22.236,38.11 CA1.1 ; U6.2@23.025,28.89 U6.2@23.445,29.31
  Top Layer w1: U6.2@22.276,29.337 CA1.1@22.276,34.595
  Bottom Layer w0.3: v1@-11.1,46.94 -11.1,60.63 -10.897,60.833 v1(-9.55,60.833) ; v1(-9.64,72.44) -9.64,65.76 v1(-9.55,65.67)
  Bottom Layer w0.4: v5@-22.53,11.162 -22.267,11.425 -22.267,17.593 -16.84,23.02 v1@-16.84,33.71
  Bottom Layer w0.5: v1@-50.749,24.028 v1@-50.749,72.441 ; v5(-22.53,10.95) v5@-22.53,11.162 ; v1@-16.84,33.71 v1(-16.81,33.74) ; v1(-16.82,34.31) -16.82,45.57 -15.6,46.79 v1(-11.1,46.79) v1@-10.994,46.896 ; v3(8.204,31.572) 8.204,33.604 9.957,35.357 13.386,35.357 18.923,40.894 v3(21.438,40.894)
  other v1: -20.03,19.7 -50.724,24.049 -16.262,33.74 -15.715,33.74 -15.168,33.74 -14.62,33.74 -16.272,34.31 -15.178,34.31 -14.63,34.31 -50.699,47.875 -50.749,64.562 -50.699,72.436
pads on no net: JTAG.17 JTAG.19 P6.5 P6.6 U1. U1.3 U1.4 U1.5 U1.6 U1.8 U1.9 U1.13 U1.16 U1.17 U1.21 U1.23 U1.24 U1.25 U1.29 U2.2 U2.3 U2.5 U4.2 U4.3 U4.6 U4.8 U4.9 U4.10 U4.11 U4.12 U4.14 U4.19 U4.22 U4.24 U4.27 U4.28

## Polygon pours and split planes (outlines as drawn)
GND on Top Layer "Top Layer-No Net" (solid, remove dead copper, pour order 10): -54.2,82.75 -52.131,84.819 -44.9,84.819 -44.231,84.15 -39.872,79.791 -39.799,79.791 -35.439,79.791 -35.369,79.721 -35.341,79.693 -35.341,77.241 -35.341,52.908 -34.986,52.553 -34.706,52.273 -24.089,52.273 -18.247,52.273 -17.968,52.553 -17.993,52.578 -17.993,55.321 -17.993,81.559 -16.799,82.753 -15.849,83.703 -15.849,83.901 -7.929,83.901 -7.924,83.896 -6.868,83.896 -6.868,83.788 -4.08,81 -1.082,81 -0.721,81 -0.213,80.493 -0.112,80.391 -0.112,80.162 -0.112,11.684 -0.213,11.582 -0.747,11.049 -0.772,11.049 -4.031,11.049 -4.08,11 -11.01,4.07 -11.01,1.27 -11.034,1.246 -11.034,0.991 -11.034,0.762 -11.161,0.635 -11.694,0.102 -11.923,0.102 -12.178,0.102 -12.28,0 -24.165,0 -48.473,0 -48.549,0.076 -48.981,0.508 -48.981,0.838 -48.981,3.984 -49.01,4.013 -54.2,9.203 -54.2,9.27 -54.2,82.75 -52.131,84.819
GND on Top Layer "Top Layer-No Net" (solid, remove dead copper, pour order 11): 0,45.644 0.051,45.695 27.864,45.695 27.864,0.94 27.711,0.787 27,0.076 26.568,0.076 0.051,0.076 0,0.127 0,45.695
GND1 on Top Layer "Top Layer-No Net" (solid, remove dead copper, pour order 13): -0.127,92.151 -0.113,92.165 26.645,92.165 27.013,92.165 27.686,91.492 27.762,91.416 27.762,56.389 0.076,56.389 -0.127,56.593 -0.127,92.151
GND on Bottom Layer "Top Layer-No Net" (solid, remove dead copper, pour order 9): -54.356,82.931 -52.287,85 -45.056,85 -44.387,84.331 -40.028,79.972 -39.955,79.972 -35.595,79.972 -35.525,79.902 -35.497,79.874 -35.497,77.422 -35.497,53.089 -35.142,52.734 -34.862,52.454 -24.245,52.454 -18.403,52.454 -18.124,52.734 -18.149,52.759 -18.149,55.502 -18.149,81.74 -16.955,82.934 -16.005,83.884 -16.005,84.082 -8.085,84.082 -8.08,84.077 -7.024,84.077 -7.024,83.969 -4.236,81.181 -1.238,81.181 -0.877,81.181 -0.369,80.674 -0.268,80.572 -0.268,80.343 -0.268,11.865 -0.369,11.763 -0.903,11.23 -0.928,11.23 -4.187,11.23 -4.236,11.181 -11.166,4.251 -11.166,1.451 -11.19,1.427 -11.19,1.172 -11.19,0.943 -11.317,0.816 -11.85,0.283 -12.079,0.283 -12.334,0.283 -12.436,0.181 -24.321,0.181 -48.629,0.181 -48.705,0.257 -49.137,0.689 -49.137,1.019 -49.137,4.165 -49.166,4.194 -54.356,9.384 -54.356,9.451 -54.356,82.931 -52.287,85
VDD33 on Bottom Layer "Top Layer-No Net 1" (solid, pour order 14): -17.12,33.11 -14.36,33.11 -14.22,33.25 -14.22,34.71 -14.33,34.82 -17.15,34.82 -17.26,34.71 -17.26,33.25
GND1 on Bottom Layer "Top Layer-No Net" (solid, remove dead copper, pour order 12): 0,92.227 0.014,92.242 26.772,92.242 27.14,92.242 27.813,91.568 27.889,91.492 27.889,56.466 0.203,56.466 0,56.669 0,92.227
GND on Bottom Layer "Top Layer-No Net" (solid, remove dead copper, pour order 8): -0.188,45.644 -0.137,45.695 27.676,45.695 27.676,0.94 27.523,0.787 26.812,0.076 26.38,0.076 -0.137,0.076 -0.188,0.127 -0.188,45.695

## Keep-outs
Keep-Out Layer:
  circle w0.254: c-10,11 r1.7
  circle w0.254: c-10,81 r1.7
  circle w0.254: c-50,81 r1.7
  circle w0.254: c-50,11 r1.7
  lines w0.2: -0.025,80.95 -0.025,91.11 0.051,91.186
  lines w0.203: -0.03,52.07 27.838,52.07
  lines w0.254: -54.2,9.27 -54.2,15.23 ; -54.2,15 -54.2,82.75 ; -54.19,9.27 -49,4.08 -49,1.016 ccw(c-47.984,1.016) -47.984,0 -47,0 -13,0 -12.27,0 ccw(c-12.27,1.27) -11,1.27 -11,4.07 -4.07,11 -1.199,11 ; -54.19,82.75 -49,87.94 -49,90.73 ; -49,90.678 -49,90.73 ; -47.73,92 ccw(c-47.73,90.73) -49,90.73 ; -46.72,92 -45.99,92 -11.99,92 ; -12.195,92 cw(c-12.195,90.805) -11,90.805 -11,87.93 -4.07,81 -1.072,81 cw(c-1.072,79.928) 0,79.928 0,13 0,12.199 ; -0.03,26.263 -0.03,38.708 -0.03,42.972 ; -0.03,42.62 -0.03,79.71 ; -0.005,91.053 cw(c1.194,91.053) 1.194,92.252 ; 1.041,92.252 26.797,92.266 ; 1.067,0 26.568,0 ccw(c26.568,1.31) 27.878,1.31 27.878,94.183 ; 1.199,-0.005 cw(c1.199,1.194) 0,1.194 0,12.199 ; 26.679,92.268 cw(c26.679,91.069) 27.878,91.069 ; -1.199,11 ccw(c-1.199,12.199) 0,12.199 ; -1.199,11 ccw(c-1.199,12.199) 0,12.199

## Silkscreen, mask and mechanical layers (free items; w line width, h text height)
Top Overlay:
  circle w0.15: c-40.5,30.57 r1.422
  circle w0.15: c-40.45,39.28 r1.422
  circle w0.254: c-50,81 r3
  circle w0.254: c-10,81 r3
  circle w0.254: c-10,11 r3
  circle w0.254: c-50,11 r3
  lines w0.254: -18.73,31.21 -17.91,31.21 ; -18.31,30.82 -18.31,31.64 ; -15.84,36.41 -15.84,37.23 ; -5.8,63.53 -4.98,63.53 ; -5.69,70.4 -4.87,70.4 ; -5.38,63.14 -5.38,63.96 ; -5.27,69.98 -5.27,70.8
  text "GND" at -51.714,65.938 h0.5 r270
  text "VDD33" at -51.714,63.449 h0.5 r270
  text "RESET" at -51.714,60.427 h0.5 r270
  text "JTMS" at -51.74,57.328 h0.5 r270
  text "KEY1" at -0.127,55.905 h0.8 r90
  text "JTCK" at -51.689,54.762 h0.5 r270
  text "KEY2" at -0.127,50.47 h0.8 r90
  text "KEY3" at -0.127,45.288 h0.8 r90
  text "1" at 16.459,39.802 h1.5
  text "KEY4" at -0.152,39.751 h0.8 r90
  text "6" at 0.838,39.726 h1.52
  text "1" at 26.01,39.649 h1.5
  text "GND" at -38.66,38.85 h0.8
  text "6" at -52.349,37.516 h1.5 r270
  text "GND" at -51.74,35.966 h0.5 r270
  text "3.3V" at -19.66,35.17 h0.8
  text "RESET" at -51.816,33.655 h0.5 r270
  text "RXD" at -51.867,30.531 h0.5 r270
  text "DC 9V" at -38.64,30.41 h0.8
  text "TXD" at -51.867,28.346 h0.5 r270
  text "BOOT" at -51.918,26.162 h0.5 r270
  text "3.3V" at -51.892,23.444 h0.5 r270
  text "GND" at -21.44,23.27 h0.8
  text "1" at -52.222,20.98 h1.5 r270
  text "VCC" at 15.088,10.693 h0.8
  text "D+" at 8.382,10.617 h0.8
  text "GND" at -23.59,8.11 h0.8
  text "D-" at 8.484,7.899 h0.8
  text "GND" at 14.91,7.899 h0.8
  text "+24V" at -14.76,6.89 h0.8
  text "485_B" at -29.78,4.8 h0.8
  text "485_A" at -25.52,4.8 h0.8
  text "JK" at -47.422,4.75 h1.52
  text "GND" at -20.75,4.667 h0.8
  text "+24V" at -17.85,4.667 h0.8
  text "9V" at -43.815,1.041 h1.52
  text "GND" at -39.04,1.041 h1.52
Top Solder:
  rectangle: -10.29,17.98 -7.78,20.26

## Dimensions
0,94.08 to 27.878,94.183 on Mechanical 1
-45.99,92 to -47,0 on Keep-Out Layer
-54.2,15 to 0,79.928 on Mechanical 1
-54.2,9.27 to 27.878,1.31 on Mechanical 1

## Text inside footprints (layer, text, board x,y; h text height)
CN5: Top Overlay "1" at -51.384,66.853 h0.8 r270; Top Overlay "5" at -51.587,52.578 h0.8 r270
CN5-1: Top Overlay "1" at 23.887,60.892 h0.8 r90; Top Overlay "5" at 23.707,71.992 h0.8 r90
ISP: Top Overlay "6" at -47.676,36.924 h0.8 r270; Top Overlay "1" at -47.616,21.124 h0.8 r270
ISP2: Top Overlay "6" at 1.64,44.11 h0.8; Top Overlay "1" at 17.44,44.17 h0.8
L1: Top Overlay "GS" at -7.69,32.048 h0.8
L2: Top Overlay "GS" at -27.049,35.874 h0.8
P1: Top Overlay "4" at -26.76,3.04 h0.8; Top Overlay "1" at -16.55,2.82 h0.8
P5: Top Overlay "4" at -31.7,28.15 h0.8; Top Overlay "1" at -31.445,23.647 h0.8; Top Overlay "3" at -22.63,24.9 h0.8; Top Overlay "6" at -22.63,27.89 h0.8